# EAGLE board Qwiic_Multi_Port_Board-Panel (EAGLE 9.6.2), part 1 of 2
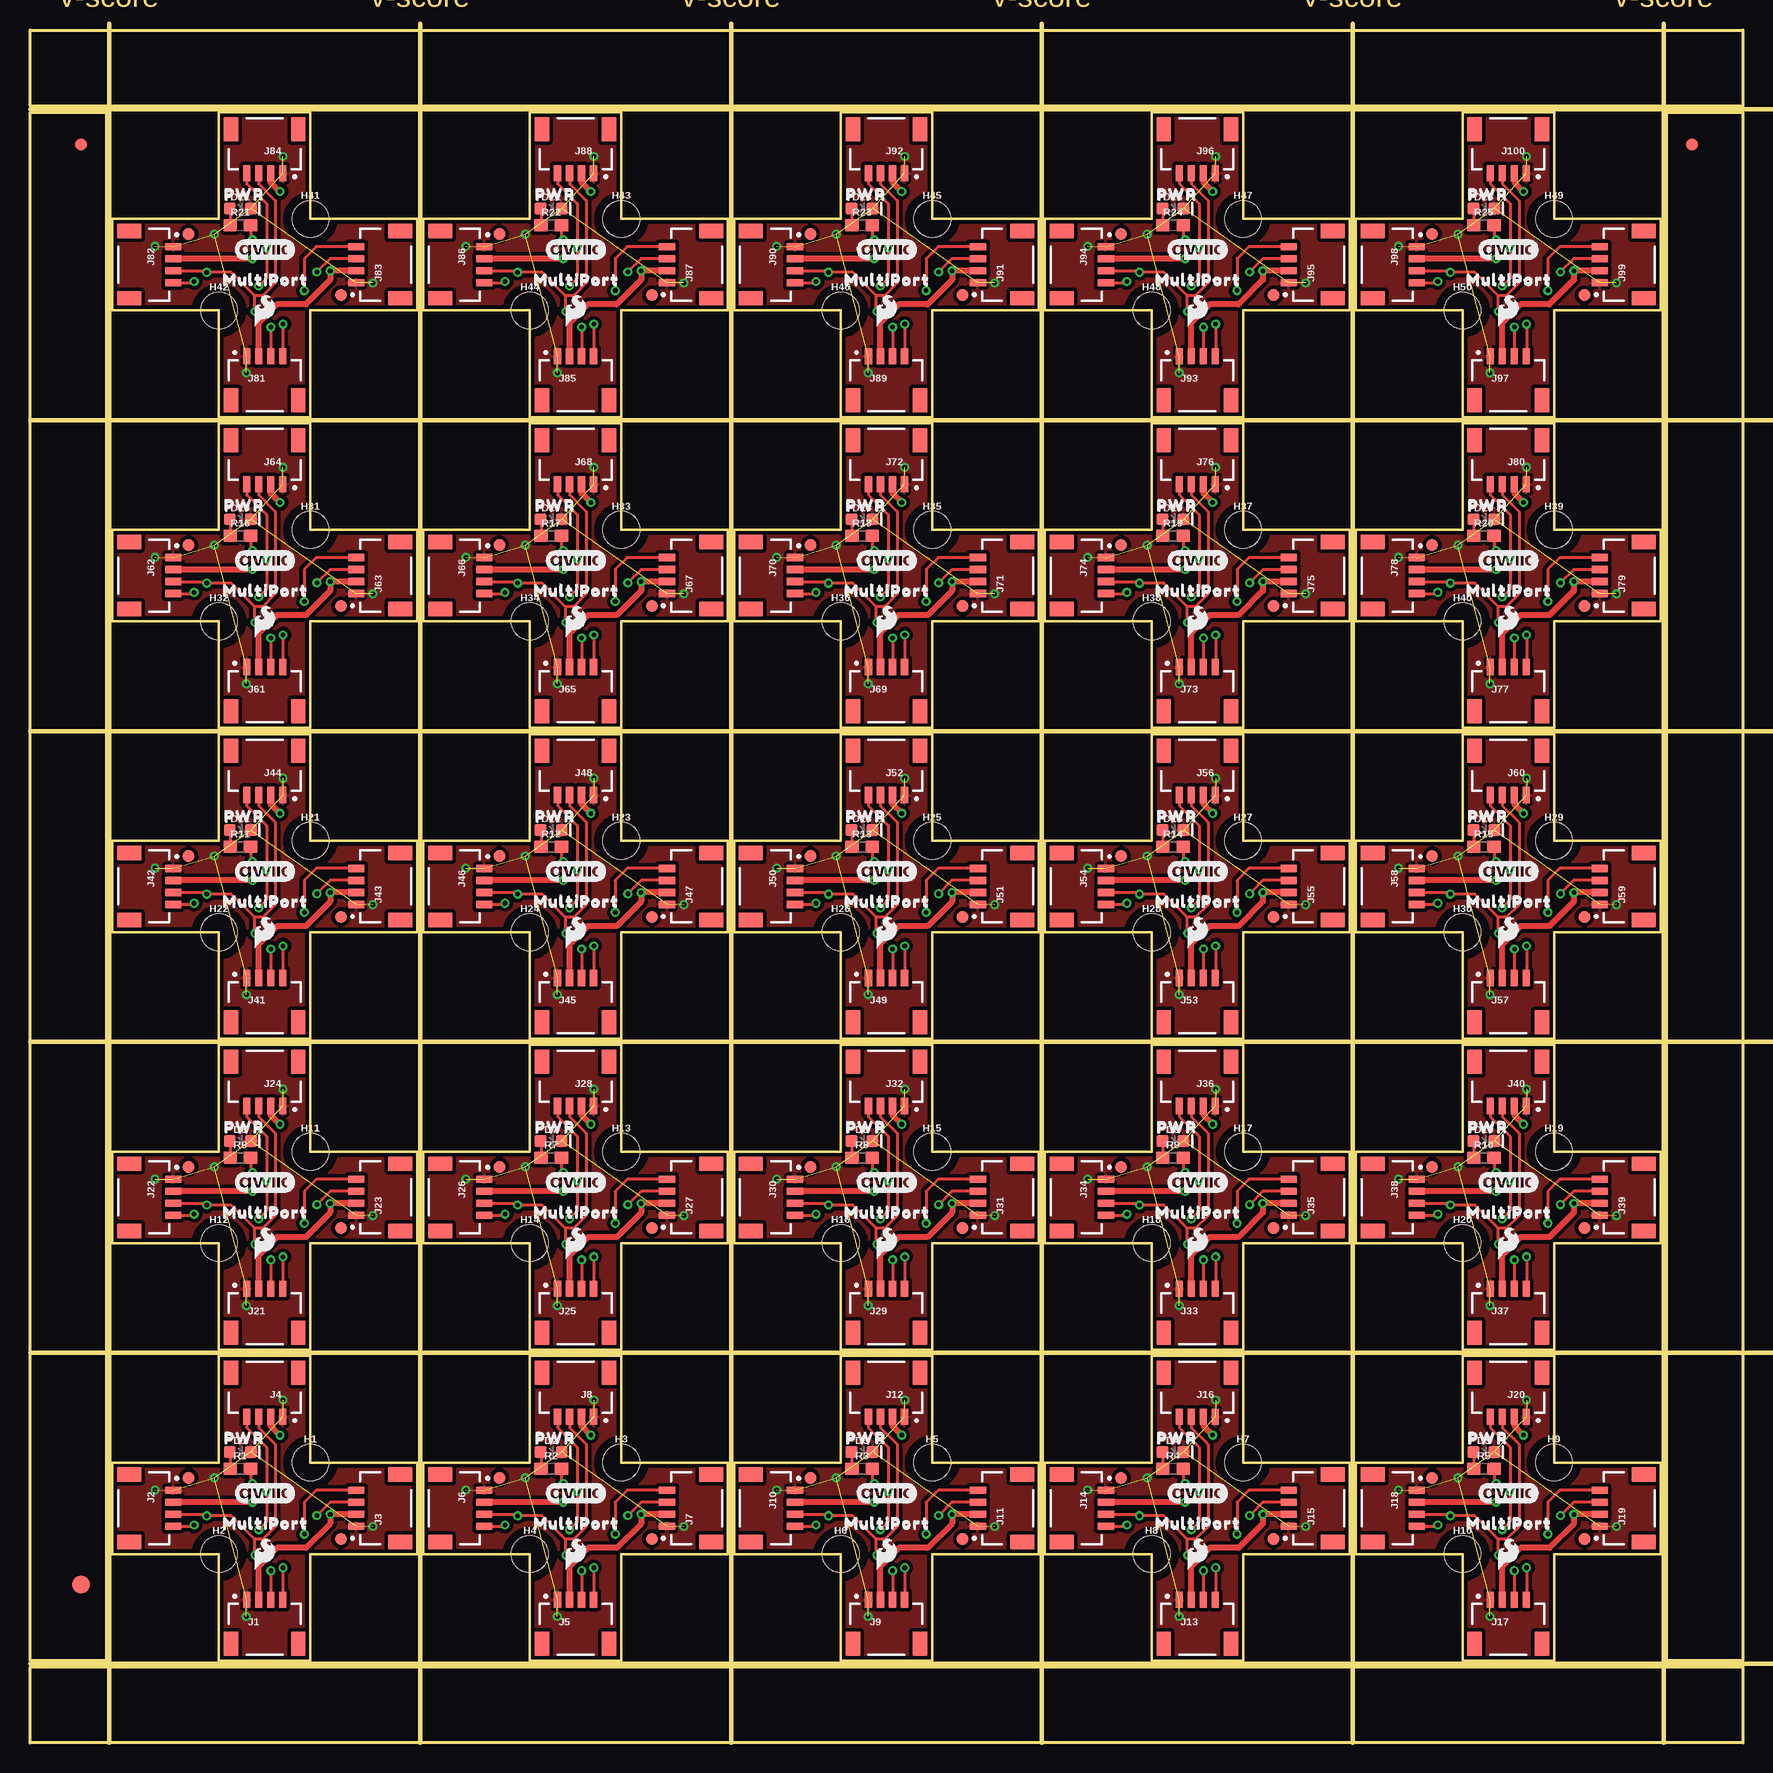
[diagram p0: board, top side]
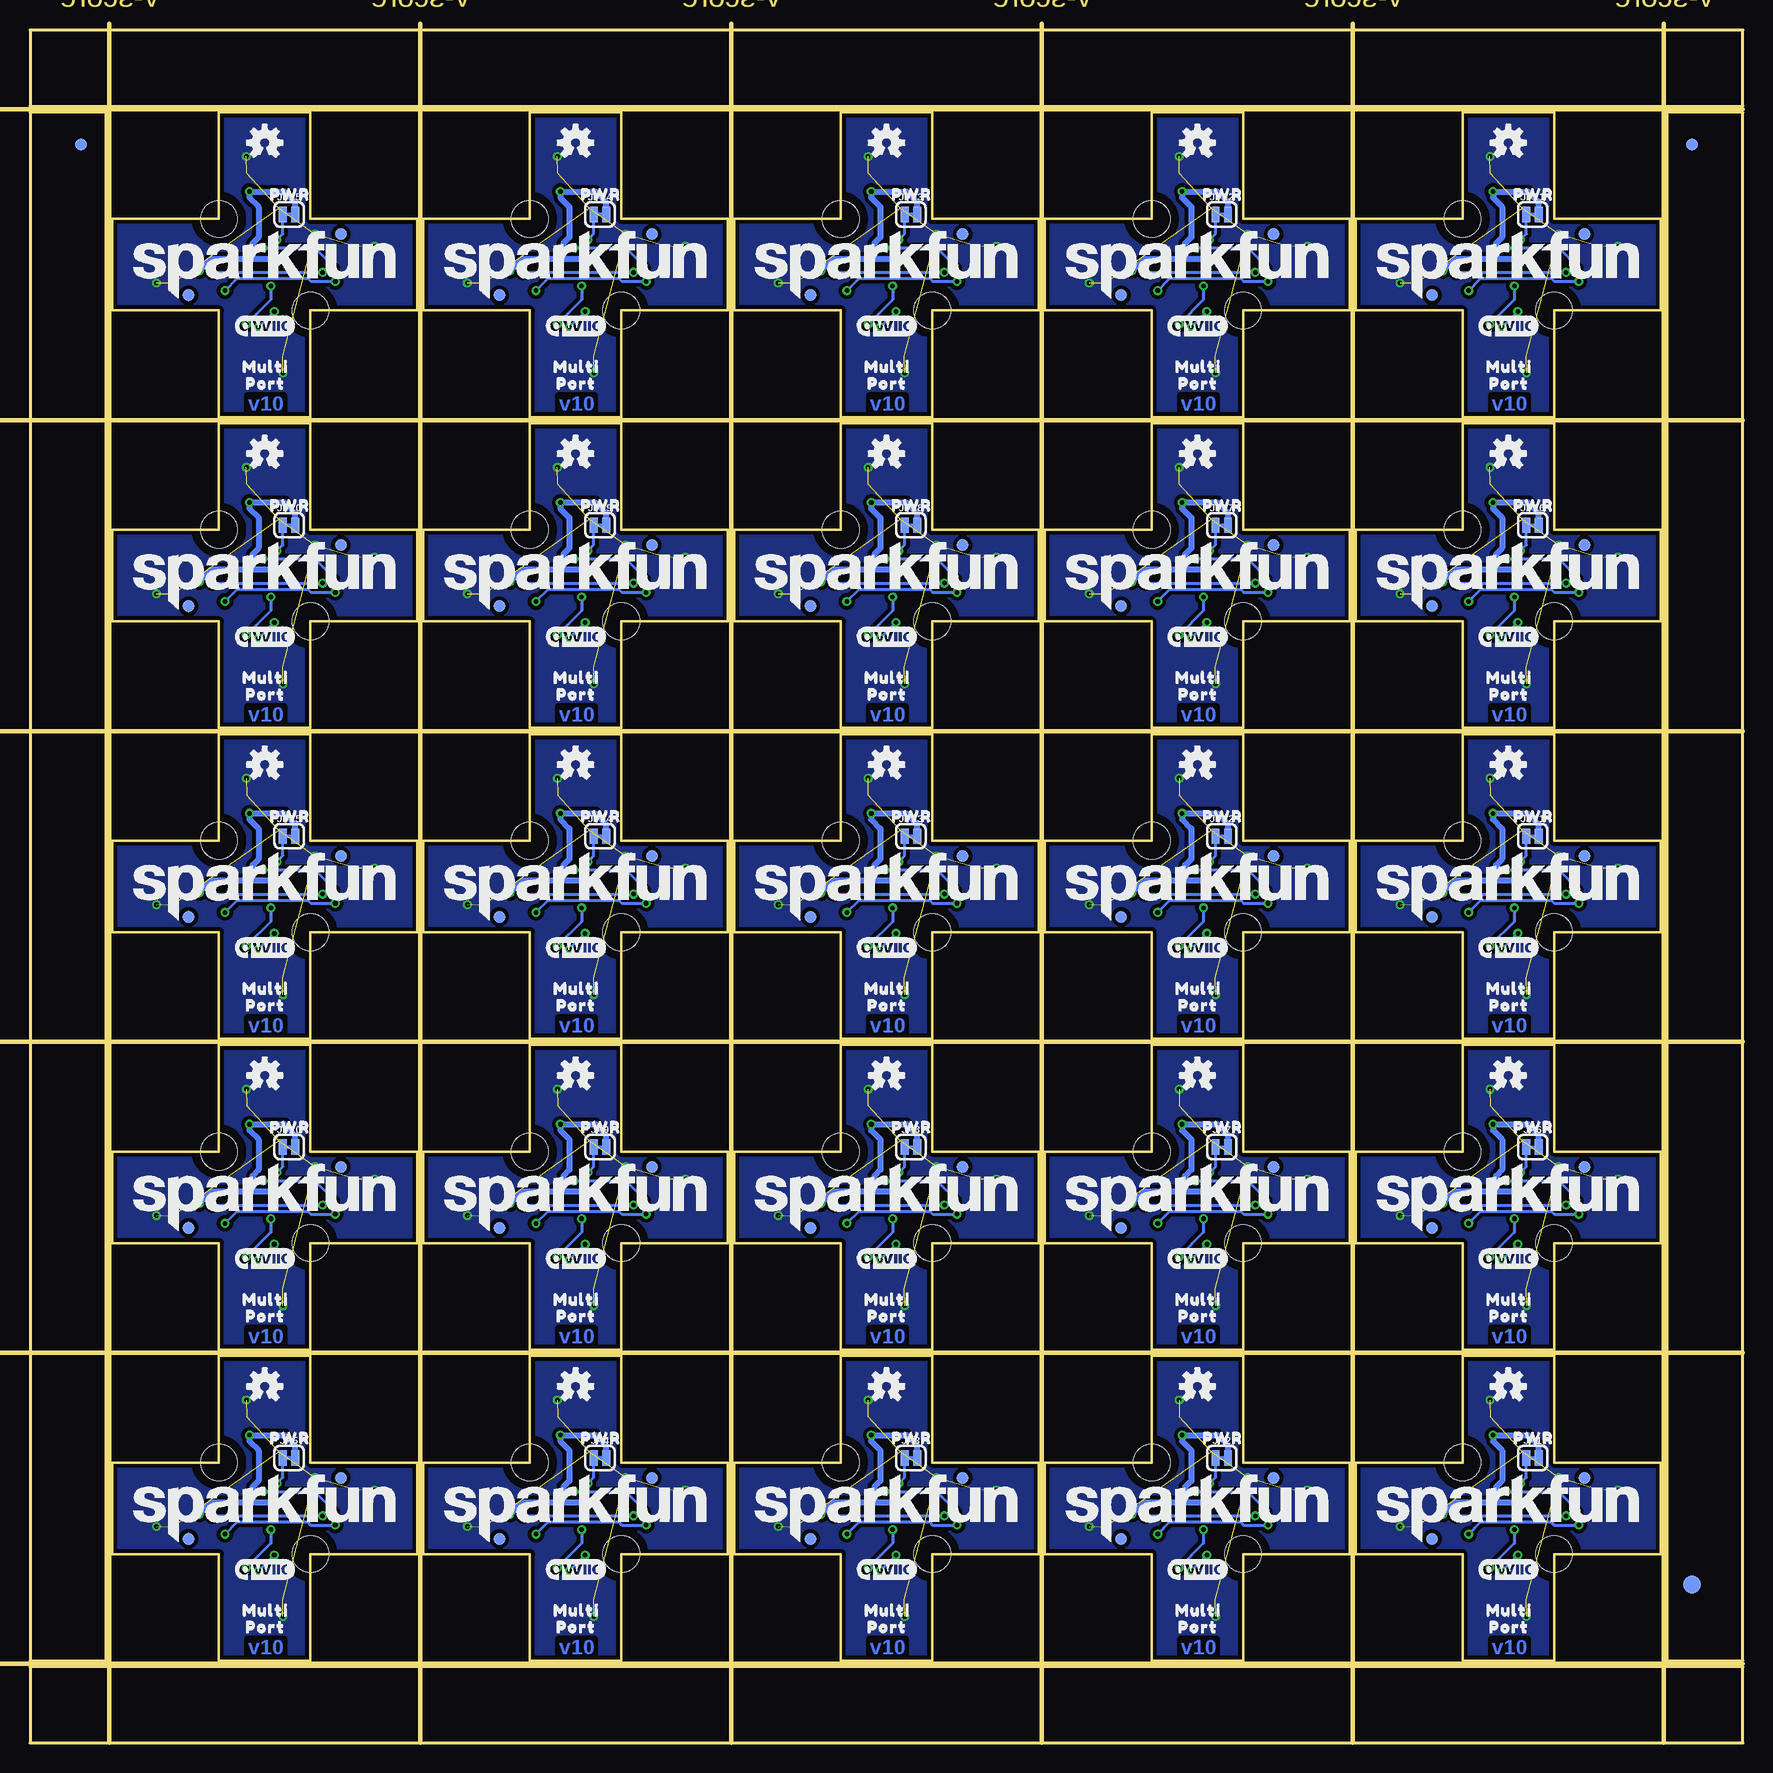
[diagram p1: board, bottom side, seen from below]

Size 142.75 x 142.75 mm. Coordinates in mm from the lower left corner, seen from the top.
Outline: 316 segments
Copper layers (1*16): Top 0.035mm / dielectric 1.5mm / Bottom 0.035mm
Design rules "Qwiic_Multi_Port_Board": minimum track width 7mil, minimum drill 0.3mm, track to track 7mil, track to pad 7mil, pad to pad 7mil, via to via 7mil, smd to smd 7mil, copper to edge 7mil, drill to drill 7mil, minimum pad ring 7mil, minimum via ring 7mil, stop-mask expansion 3mil, vias tented up to drill 25mil, thermal gap 10mil
Milling: 12 lines

## Footprints (pad centres in the part's own frame; a part is rotated, then mirrored left to right if it is on the bottom)
LED-0603 = smd 1 x 1: A -0.877,0; C 0.877,0
FIDUCIAL-1X2 = smd 1 x 1: 1 0,0
FIDUCIAL-1.5X3 = smd 1.5 x 1.5: 1 0,0
STAND-OFF-TIGHT = hole 3.048: 0,0
JST04_1MM_RA = smd 0.6 x 1.35: 1 -1.5,0; 2 -0.5,0; 3 0.5,0; 4 1.5,0 | smd 1.2 x 2: NC1 2.8,-3.675; NC2 -2.8,-3.675
SMT-JUMPER_2_NC_TRACE_SILK = smd 0.66 x 1.27: 1 -0.521,0; 2 0.521,0
0603 = smd 1.1 x 1: 1 -0.85,0; 2 0.85,0

## Placement (x,y rotation side)
D1  RED  [LED-0603]  17.53,24.26 0 top
D2  RED  [LED-0603]  43.43,24.26 0 top
D3  RED  [LED-0603]  69.34,24.26 0 top
D4  RED  [LED-0603]  95.25,24.26 0 top
D5  RED  [LED-0603]  121.16,24.26 0 top
D6  RED  [LED-0603]  17.53,50.16 0 top
D7  RED  [LED-0603]  43.43,50.16 0 top
D8  RED  [LED-0603]  69.34,50.16 0 top
D9  RED  [LED-0603]  95.25,50.16 0 top
D10  RED  [LED-0603]  121.16,50.16 0 top
D11  RED  [LED-0603]  17.53,76.07 0 top
D12  RED  [LED-0603]  43.43,76.07 0 top
D13  RED  [LED-0603]  69.34,76.07 0 top
D14  RED  [LED-0603]  95.25,76.07 0 top
D15  RED  [LED-0603]  121.16,76.07 0 top
D16  RED  [LED-0603]  17.53,101.98 0 top
D17  RED  [LED-0603]  43.43,101.98 0 top
D18  RED  [LED-0603]  69.34,101.98 0 top
D19  RED  [LED-0603]  95.25,101.98 0 top
D20  RED  [LED-0603]  121.16,101.98 0 top
D21  RED  [LED-0603]  17.53,127.89 0 top
D22  RED  [LED-0603]  43.43,127.89 0 top
D23  RED  [LED-0603]  69.34,127.89 0 top
D24  RED  [LED-0603]  95.25,127.89 0 top
D25  RED  [LED-0603]  121.16,127.89 0 top
E$1  [FIDUCIAL-1X2]  4.23,133.22 0 top
E$2  [FIDUCIAL-1X2]  4.23,133.22 0 bottom
E$3  [FIDUCIAL-1X2]  138.51,133.22 0 top
E$4  [FIDUCIAL-1X2]  138.51,133.22 0 bottom
E$5  [FIDUCIAL-1.5X3]  4.23,13.21 0 top
E$6  [FIDUCIAL-1.5X3]  4.23,13.21 0 bottom
FD1  FIDUCIAL1X2  [FIDUCIAL-1X2]  13.21,22.1 0 bottom
FD2  FIDUCIAL1X2  [FIDUCIAL-1X2]  13.21,22.1 0 top
FD3  FIDUCIAL1X2  [FIDUCIAL-1X2]  25.91,17.02 0 top
FD4  FIDUCIAL1X2  [FIDUCIAL-1X2]  25.91,17.02 0 bottom
FD5  FIDUCIAL1X2  [FIDUCIAL-1X2]  39.12,22.1 0 bottom
FD6  FIDUCIAL1X2  [FIDUCIAL-1X2]  39.12,22.1 0 top
FD7  FIDUCIAL1X2  [FIDUCIAL-1X2]  51.82,17.02 0 top
FD8  FIDUCIAL1X2  [FIDUCIAL-1X2]  51.82,17.02 0 bottom
FD9  FIDUCIAL1X2  [FIDUCIAL-1X2]  65.02,22.1 0 bottom
FD10  FIDUCIAL1X2  [FIDUCIAL-1X2]  65.02,22.1 0 top
FD11  FIDUCIAL1X2  [FIDUCIAL-1X2]  77.72,17.02 0 top
FD12  FIDUCIAL1X2  [FIDUCIAL-1X2]  77.72,17.02 0 bottom
FD13  FIDUCIAL1X2  [FIDUCIAL-1X2]  90.93,22.1 0 bottom
FD14  FIDUCIAL1X2  [FIDUCIAL-1X2]  90.93,22.1 0 top
FD15  FIDUCIAL1X2  [FIDUCIAL-1X2]  103.63,17.02 0 top
FD16  FIDUCIAL1X2  [FIDUCIAL-1X2]  103.63,17.02 0 bottom
FD17  FIDUCIAL1X2  [FIDUCIAL-1X2]  116.84,22.1 0 bottom
FD18  FIDUCIAL1X2  [FIDUCIAL-1X2]  116.84,22.1 0 top
FD19  FIDUCIAL1X2  [FIDUCIAL-1X2]  129.54,17.02 0 top
FD20  FIDUCIAL1X2  [FIDUCIAL-1X2]  129.54,17.02 0 bottom
FD21  FIDUCIAL1X2  [FIDUCIAL-1X2]  13.21,48.01 0 bottom
FD22  FIDUCIAL1X2  [FIDUCIAL-1X2]  13.21,48.01 0 top
FD23  FIDUCIAL1X2  [FIDUCIAL-1X2]  25.91,42.93 0 top
FD24  FIDUCIAL1X2  [FIDUCIAL-1X2]  25.91,42.93 0 bottom
FD25  FIDUCIAL1X2  [FIDUCIAL-1X2]  39.12,48.01 0 bottom
FD26  FIDUCIAL1X2  [FIDUCIAL-1X2]  39.12,48.01 0 top
FD27  FIDUCIAL1X2  [FIDUCIAL-1X2]  51.82,42.93 0 top
FD28  FIDUCIAL1X2  [FIDUCIAL-1X2]  51.82,42.93 0 bottom
FD29  FIDUCIAL1X2  [FIDUCIAL-1X2]  65.02,48.01 0 bottom
FD30  FIDUCIAL1X2  [FIDUCIAL-1X2]  65.02,48.01 0 top
FD31  FIDUCIAL1X2  [FIDUCIAL-1X2]  77.72,42.93 0 top
FD32  FIDUCIAL1X2  [FIDUCIAL-1X2]  77.72,42.93 0 bottom
FD33  FIDUCIAL1X2  [FIDUCIAL-1X2]  90.93,48.01 0 bottom
FD34  FIDUCIAL1X2  [FIDUCIAL-1X2]  90.93,48.01 0 top
FD35  FIDUCIAL1X2  [FIDUCIAL-1X2]  103.63,42.93 0 top
FD36  FIDUCIAL1X2  [FIDUCIAL-1X2]  103.63,42.93 0 bottom
FD37  FIDUCIAL1X2  [FIDUCIAL-1X2]  116.84,48.01 0 bottom
FD38  FIDUCIAL1X2  [FIDUCIAL-1X2]  116.84,48.01 0 top
FD39  FIDUCIAL1X2  [FIDUCIAL-1X2]  129.54,42.93 0 top
FD40  FIDUCIAL1X2  [FIDUCIAL-1X2]  129.54,42.93 0 bottom
FD41  FIDUCIAL1X2  [FIDUCIAL-1X2]  13.21,73.91 0 bottom
FD42  FIDUCIAL1X2  [FIDUCIAL-1X2]  13.21,73.91 0 top
FD43  FIDUCIAL1X2  [FIDUCIAL-1X2]  25.91,68.83 0 top
FD44  FIDUCIAL1X2  [FIDUCIAL-1X2]  25.91,68.83 0 bottom
FD45  FIDUCIAL1X2  [FIDUCIAL-1X2]  39.12,73.91 0 bottom
FD46  FIDUCIAL1X2  [FIDUCIAL-1X2]  39.12,73.91 0 top
FD47  FIDUCIAL1X2  [FIDUCIAL-1X2]  51.82,68.83 0 top
FD48  FIDUCIAL1X2  [FIDUCIAL-1X2]  51.82,68.83 0 bottom
FD49  FIDUCIAL1X2  [FIDUCIAL-1X2]  65.02,73.91 0 bottom
FD50  FIDUCIAL1X2  [FIDUCIAL-1X2]  65.02,73.91 0 top
FD51  FIDUCIAL1X2  [FIDUCIAL-1X2]  77.72,68.83 0 top
FD52  FIDUCIAL1X2  [FIDUCIAL-1X2]  77.72,68.83 0 bottom
FD53  FIDUCIAL1X2  [FIDUCIAL-1X2]  90.93,73.91 0 bottom
FD54  FIDUCIAL1X2  [FIDUCIAL-1X2]  90.93,73.91 0 top
FD55  FIDUCIAL1X2  [FIDUCIAL-1X2]  103.63,68.83 0 top
FD56  FIDUCIAL1X2  [FIDUCIAL-1X2]  103.63,68.83 0 bottom
FD57  FIDUCIAL1X2  [FIDUCIAL-1X2]  116.84,73.91 0 bottom
FD58  FIDUCIAL1X2  [FIDUCIAL-1X2]  116.84,73.91 0 top
FD59  FIDUCIAL1X2  [FIDUCIAL-1X2]  129.54,68.83 0 top
FD60  FIDUCIAL1X2  [FIDUCIAL-1X2]  129.54,68.83 0 bottom
FD61  FIDUCIAL1X2  [FIDUCIAL-1X2]  13.21,99.82 0 bottom
FD62  FIDUCIAL1X2  [FIDUCIAL-1X2]  13.21,99.82 0 top
FD63  FIDUCIAL1X2  [FIDUCIAL-1X2]  25.91,94.74 0 top
FD64  FIDUCIAL1X2  [FIDUCIAL-1X2]  25.91,94.74 0 bottom
FD65  FIDUCIAL1X2  [FIDUCIAL-1X2]  39.12,99.82 0 bottom
FD66  FIDUCIAL1X2  [FIDUCIAL-1X2]  39.12,99.82 0 top
FD67  FIDUCIAL1X2  [FIDUCIAL-1X2]  51.82,94.74 0 top
FD68  FIDUCIAL1X2  [FIDUCIAL-1X2]  51.82,94.74 0 bottom
FD69  FIDUCIAL1X2  [FIDUCIAL-1X2]  65.02,99.82 0 bottom
FD70  FIDUCIAL1X2  [FIDUCIAL-1X2]  65.02,99.82 0 top
FD71  FIDUCIAL1X2  [FIDUCIAL-1X2]  77.72,94.74 0 top
FD72  FIDUCIAL1X2  [FIDUCIAL-1X2]  77.72,94.74 0 bottom
FD73  FIDUCIAL1X2  [FIDUCIAL-1X2]  90.93,99.82 0 bottom
FD74  FIDUCIAL1X2  [FIDUCIAL-1X2]  90.93,99.82 0 top
FD75  FIDUCIAL1X2  [FIDUCIAL-1X2]  103.63,94.74 0 top
FD76  FIDUCIAL1X2  [FIDUCIAL-1X2]  103.63,94.74 0 bottom
FD77  FIDUCIAL1X2  [FIDUCIAL-1X2]  116.84,99.82 0 bottom
FD78  FIDUCIAL1X2  [FIDUCIAL-1X2]  116.84,99.82 0 top
FD79  FIDUCIAL1X2  [FIDUCIAL-1X2]  129.54,94.74 0 top
FD80  FIDUCIAL1X2  [FIDUCIAL-1X2]  129.54,94.74 0 bottom
FD81  FIDUCIAL1X2  [FIDUCIAL-1X2]  13.21,125.73 0 bottom
FD82  FIDUCIAL1X2  [FIDUCIAL-1X2]  13.21,125.73 0 top
FD83  FIDUCIAL1X2  [FIDUCIAL-1X2]  25.91,120.65 0 top
FD84  FIDUCIAL1X2  [FIDUCIAL-1X2]  25.91,120.65 0 bottom
FD85  FIDUCIAL1X2  [FIDUCIAL-1X2]  39.12,125.73 0 bottom
FD86  FIDUCIAL1X2  [FIDUCIAL-1X2]  39.12,125.73 0 top
FD87  FIDUCIAL1X2  [FIDUCIAL-1X2]  51.82,120.65 0 top
FD88  FIDUCIAL1X2  [FIDUCIAL-1X2]  51.82,120.65 0 bottom
FD89  FIDUCIAL1X2  [FIDUCIAL-1X2]  65.02,125.73 0 bottom
FD90  FIDUCIAL1X2  [FIDUCIAL-1X2]  65.02,125.73 0 top
FD91  FIDUCIAL1X2  [FIDUCIAL-1X2]  77.72,120.65 0 top
FD92  FIDUCIAL1X2  [FIDUCIAL-1X2]  77.72,120.65 0 bottom
FD93  FIDUCIAL1X2  [FIDUCIAL-1X2]  90.93,125.73 0 bottom
FD94  FIDUCIAL1X2  [FIDUCIAL-1X2]  90.93,125.73 0 top
FD95  FIDUCIAL1X2  [FIDUCIAL-1X2]  103.63,120.65 0 top
FD96  FIDUCIAL1X2  [FIDUCIAL-1X2]  103.63,120.65 0 bottom
FD97  FIDUCIAL1X2  [FIDUCIAL-1X2]  116.84,125.73 0 bottom
FD98  FIDUCIAL1X2  [FIDUCIAL-1X2]  116.84,125.73 0 top
FD99  FIDUCIAL1X2  [FIDUCIAL-1X2]  129.54,120.65 0 top
FD100  FIDUCIAL1X2  [FIDUCIAL-1X2]  129.54,120.65 0 bottom
H1  STAND-OFFTIGHT  [STAND-OFF-TIGHT]  23.37,23.37 0 top
H2  STAND-OFFTIGHT  [STAND-OFF-TIGHT]  15.75,15.75 0 top
H3  STAND-OFFTIGHT  [STAND-OFF-TIGHT]  49.28,23.37 0 top
H4  STAND-OFFTIGHT  [STAND-OFF-TIGHT]  41.66,15.75 0 top
H5  STAND-OFFTIGHT  [STAND-OFF-TIGHT]  75.18,23.37 0 top
H6  STAND-OFFTIGHT  [STAND-OFF-TIGHT]  67.56,15.75 0 top
H7  STAND-OFFTIGHT  [STAND-OFF-TIGHT]  101.09,23.37 0 top
H8  STAND-OFFTIGHT  [STAND-OFF-TIGHT]  93.47,15.75 0 top
H9  STAND-OFFTIGHT  [STAND-OFF-TIGHT]  127,23.37 0 top
H10  STAND-OFFTIGHT  [STAND-OFF-TIGHT]  119.38,15.75 0 top
H11  STAND-OFFTIGHT  [STAND-OFF-TIGHT]  23.37,49.28 0 top
H12  STAND-OFFTIGHT  [STAND-OFF-TIGHT]  15.75,41.66 0 top
H13  STAND-OFFTIGHT  [STAND-OFF-TIGHT]  49.28,49.28 0 top
H14  STAND-OFFTIGHT  [STAND-OFF-TIGHT]  41.66,41.66 0 top
H15  STAND-OFFTIGHT  [STAND-OFF-TIGHT]  75.18,49.28 0 top
H16  STAND-OFFTIGHT  [STAND-OFF-TIGHT]  67.56,41.66 0 top
H17  STAND-OFFTIGHT  [STAND-OFF-TIGHT]  101.09,49.28 0 top
H18  STAND-OFFTIGHT  [STAND-OFF-TIGHT]  93.47,41.66 0 top
H19  STAND-OFFTIGHT  [STAND-OFF-TIGHT]  127,49.28 0 top
H20  STAND-OFFTIGHT  [STAND-OFF-TIGHT]  119.38,41.66 0 top
H21  STAND-OFFTIGHT  [STAND-OFF-TIGHT]  23.37,75.18 0 top
H22  STAND-OFFTIGHT  [STAND-OFF-TIGHT]  15.75,67.56 0 top
H23  STAND-OFFTIGHT  [STAND-OFF-TIGHT]  49.28,75.18 0 top
H24  STAND-OFFTIGHT  [STAND-OFF-TIGHT]  41.66,67.56 0 top
H25  STAND-OFFTIGHT  [STAND-OFF-TIGHT]  75.18,75.18 0 top
H26  STAND-OFFTIGHT  [STAND-OFF-TIGHT]  67.56,67.56 0 top
H27  STAND-OFFTIGHT  [STAND-OFF-TIGHT]  101.09,75.18 0 top
H28  STAND-OFFTIGHT  [STAND-OFF-TIGHT]  93.47,67.56 0 top
H29  STAND-OFFTIGHT  [STAND-OFF-TIGHT]  127,75.18 0 top
H30  STAND-OFFTIGHT  [STAND-OFF-TIGHT]  119.38,67.56 0 top
H31  STAND-OFFTIGHT  [STAND-OFF-TIGHT]  23.37,101.09 0 top
H32  STAND-OFFTIGHT  [STAND-OFF-TIGHT]  15.75,93.47 0 top
H33  STAND-OFFTIGHT  [STAND-OFF-TIGHT]  49.28,101.09 0 top
H34  STAND-OFFTIGHT  [STAND-OFF-TIGHT]  41.66,93.47 0 top
H35  STAND-OFFTIGHT  [STAND-OFF-TIGHT]  75.18,101.09 0 top
H36  STAND-OFFTIGHT  [STAND-OFF-TIGHT]  67.56,93.47 0 top
H37  STAND-OFFTIGHT  [STAND-OFF-TIGHT]  101.09,101.09 0 top
H38  STAND-OFFTIGHT  [STAND-OFF-TIGHT]  93.47,93.47 0 top
H39  STAND-OFFTIGHT  [STAND-OFF-TIGHT]  127,101.09 0 top
H40  STAND-OFFTIGHT  [STAND-OFF-TIGHT]  119.38,93.47 0 top
H41  STAND-OFFTIGHT  [STAND-OFF-TIGHT]  23.37,127 0 top
H42  STAND-OFFTIGHT  [STAND-OFF-TIGHT]  15.75,119.38 0 top
H43  STAND-OFFTIGHT  [STAND-OFF-TIGHT]  49.28,127 0 top
H44  STAND-OFFTIGHT  [STAND-OFF-TIGHT]  41.66,119.38 0 top
H45  STAND-OFFTIGHT  [STAND-OFF-TIGHT]  75.18,127 0 top
H46  STAND-OFFTIGHT  [STAND-OFF-TIGHT]  67.56,119.38 0 top
H47  STAND-OFFTIGHT  [STAND-OFF-TIGHT]  101.09,127 0 top
H48  STAND-OFFTIGHT  [STAND-OFF-TIGHT]  93.47,119.38 0 top
H49  STAND-OFFTIGHT  [STAND-OFF-TIGHT]  127,127 0 top
H50  STAND-OFFTIGHT  [STAND-OFF-TIGHT]  119.38,119.38 0 top
J1  QWIIC_RIGHT_ANGLE  [JST04_1MM_RA]  19.56,11.94 0 top
J2  QWIIC_RIGHT_ANGLE  [JST04_1MM_RA]  11.94,19.56 270 top
J3  QWIIC_RIGHT_ANGLE  [JST04_1MM_RA]  27.18,19.56 90 top
J4  QWIIC_RIGHT_ANGLE  [JST04_1MM_RA]  19.56,27.18 180 top
J5  QWIIC_RIGHT_ANGLE  [JST04_1MM_RA]  45.47,11.94 0 top
J6  QWIIC_RIGHT_ANGLE  [JST04_1MM_RA]  37.85,19.56 270 top
J7  QWIIC_RIGHT_ANGLE  [JST04_1MM_RA]  53.09,19.56 90 top
J8  QWIIC_RIGHT_ANGLE  [JST04_1MM_RA]  45.47,27.18 180 top
J9  QWIIC_RIGHT_ANGLE  [JST04_1MM_RA]  71.37,11.94 0 top
J10  QWIIC_RIGHT_ANGLE  [JST04_1MM_RA]  63.75,19.56 270 top
J11  QWIIC_RIGHT_ANGLE  [JST04_1MM_RA]  78.99,19.56 90 top
J12  QWIIC_RIGHT_ANGLE  [JST04_1MM_RA]  71.37,27.18 180 top
J13  QWIIC_RIGHT_ANGLE  [JST04_1MM_RA]  97.28,11.94 0 top
J14  QWIIC_RIGHT_ANGLE  [JST04_1MM_RA]  89.66,19.56 270 top
J15  QWIIC_RIGHT_ANGLE  [JST04_1MM_RA]  104.9,19.56 90 top
J16  QWIIC_RIGHT_ANGLE  [JST04_1MM_RA]  97.28,27.18 180 top
J17  QWIIC_RIGHT_ANGLE  [JST04_1MM_RA]  123.19,11.94 0 top
J18  QWIIC_RIGHT_ANGLE  [JST04_1MM_RA]  115.57,19.56 270 top
J19  QWIIC_RIGHT_ANGLE  [JST04_1MM_RA]  130.81,19.56 90 top
J20  QWIIC_RIGHT_ANGLE  [JST04_1MM_RA]  123.19,27.18 180 top
J21  QWIIC_RIGHT_ANGLE  [JST04_1MM_RA]  19.56,37.85 0 top
J22  QWIIC_RIGHT_ANGLE  [JST04_1MM_RA]  11.94,45.47 270 top
J23  QWIIC_RIGHT_ANGLE  [JST04_1MM_RA]  27.18,45.47 90 top
J24  QWIIC_RIGHT_ANGLE  [JST04_1MM_RA]  19.56,53.09 180 top
J25  QWIIC_RIGHT_ANGLE  [JST04_1MM_RA]  45.47,37.85 0 top
J26  QWIIC_RIGHT_ANGLE  [JST04_1MM_RA]  37.85,45.47 270 top
J27  QWIIC_RIGHT_ANGLE  [JST04_1MM_RA]  53.09,45.47 90 top
J28  QWIIC_RIGHT_ANGLE  [JST04_1MM_RA]  45.47,53.09 180 top
J29  QWIIC_RIGHT_ANGLE  [JST04_1MM_RA]  71.37,37.85 0 top
J30  QWIIC_RIGHT_ANGLE  [JST04_1MM_RA]  63.75,45.47 270 top
J31  QWIIC_RIGHT_ANGLE  [JST04_1MM_RA]  78.99,45.47 90 top
J32  QWIIC_RIGHT_ANGLE  [JST04_1MM_RA]  71.37,53.09 180 top
J33  QWIIC_RIGHT_ANGLE  [JST04_1MM_RA]  97.28,37.85 0 top
J34  QWIIC_RIGHT_ANGLE  [JST04_1MM_RA]  89.66,45.47 270 top
J35  QWIIC_RIGHT_ANGLE  [JST04_1MM_RA]  104.9,45.47 90 top
J36  QWIIC_RIGHT_ANGLE  [JST04_1MM_RA]  97.28,53.09 180 top
J37  QWIIC_RIGHT_ANGLE  [JST04_1MM_RA]  123.19,37.85 0 top
J38  QWIIC_RIGHT_ANGLE  [JST04_1MM_RA]  115.57,45.47 270 top
J39  QWIIC_RIGHT_ANGLE  [JST04_1MM_RA]  130.81,45.47 90 top
J40  QWIIC_RIGHT_ANGLE  [JST04_1MM_RA]  123.19,53.09 180 top
J41  QWIIC_RIGHT_ANGLE  [JST04_1MM_RA]  19.56,63.75 0 top
J42  QWIIC_RIGHT_ANGLE  [JST04_1MM_RA]  11.94,71.37 270 top
J43  QWIIC_RIGHT_ANGLE  [JST04_1MM_RA]  27.18,71.37 90 top
J44  QWIIC_RIGHT_ANGLE  [JST04_1MM_RA]  19.56,78.99 180 top
J45  QWIIC_RIGHT_ANGLE  [JST04_1MM_RA]  45.47,63.75 0 top
J46  QWIIC_RIGHT_ANGLE  [JST04_1MM_RA]  37.85,71.37 270 top
J47  QWIIC_RIGHT_ANGLE  [JST04_1MM_RA]  53.09,71.37 90 top
J48  QWIIC_RIGHT_ANGLE  [JST04_1MM_RA]  45.47,78.99 180 top
J49  QWIIC_RIGHT_ANGLE  [JST04_1MM_RA]  71.37,63.75 0 top
J50  QWIIC_RIGHT_ANGLE  [JST04_1MM_RA]  63.75,71.37 270 top
J51  QWIIC_RIGHT_ANGLE  [JST04_1MM_RA]  78.99,71.37 90 top
J52  QWIIC_RIGHT_ANGLE  [JST04_1MM_RA]  71.37,78.99 180 top
J53  QWIIC_RIGHT_ANGLE  [JST04_1MM_RA]  97.28,63.75 0 top
J54  QWIIC_RIGHT_ANGLE  [JST04_1MM_RA]  89.66,71.37 270 top
J55  QWIIC_RIGHT_ANGLE  [JST04_1MM_RA]  104.9,71.37 90 top
J56  QWIIC_RIGHT_ANGLE  [JST04_1MM_RA]  97.28,78.99 180 top
J57  QWIIC_RIGHT_ANGLE  [JST04_1MM_RA]  123.19,63.75 0 top
J58  QWIIC_RIGHT_ANGLE  [JST04_1MM_RA]  115.57,71.37 270 top
J59  QWIIC_RIGHT_ANGLE  [JST04_1MM_RA]  130.81,71.37 90 top
J60  QWIIC_RIGHT_ANGLE  [JST04_1MM_RA]  123.19,78.99 180 top
J61  QWIIC_RIGHT_ANGLE  [JST04_1MM_RA]  19.56,89.66 0 top
J62  QWIIC_RIGHT_ANGLE  [JST04_1MM_RA]  11.94,97.28 270 top
J63  QWIIC_RIGHT_ANGLE  [JST04_1MM_RA]  27.18,97.28 90 top
J64  QWIIC_RIGHT_ANGLE  [JST04_1MM_RA]  19.56,104.9 180 top
J65  QWIIC_RIGHT_ANGLE  [JST04_1MM_RA]  45.47,89.66 0 top
J66  QWIIC_RIGHT_ANGLE  [JST04_1MM_RA]  37.85,97.28 270 top
J67  QWIIC_RIGHT_ANGLE  [JST04_1MM_RA]  53.09,97.28 90 top
J68  QWIIC_RIGHT_ANGLE  [JST04_1MM_RA]  45.47,104.9 180 top
J69  QWIIC_RIGHT_ANGLE  [JST04_1MM_RA]  71.37,89.66 0 top
J70  QWIIC_RIGHT_ANGLE  [JST04_1MM_RA]  63.75,97.28 270 top
J71  QWIIC_RIGHT_ANGLE  [JST04_1MM_RA]  78.99,97.28 90 top
J72  QWIIC_RIGHT_ANGLE  [JST04_1MM_RA]  71.37,104.9 180 top
J73  QWIIC_RIGHT_ANGLE  [JST04_1MM_RA]  97.28,89.66 0 top
J74  QWIIC_RIGHT_ANGLE  [JST04_1MM_RA]  89.66,97.28 270 top
J75  QWIIC_RIGHT_ANGLE  [JST04_1MM_RA]  104.9,97.28 90 top
J76  QWIIC_RIGHT_ANGLE  [JST04_1MM_RA]  97.28,104.9 180 top
J77  QWIIC_RIGHT_ANGLE  [JST04_1MM_RA]  123.19,89.66 0 top
J78  QWIIC_RIGHT_ANGLE  [JST04_1MM_RA]  115.57,97.28 270 top
J79  QWIIC_RIGHT_ANGLE  [JST04_1MM_RA]  130.81,97.28 90 top
J80  QWIIC_RIGHT_ANGLE  [JST04_1MM_RA]  123.19,104.9 180 top
J81  QWIIC_RIGHT_ANGLE  [JST04_1MM_RA]  19.56,115.57 0 top
J82  QWIIC_RIGHT_ANGLE  [JST04_1MM_RA]  11.94,123.19 270 top
J83  QWIIC_RIGHT_ANGLE  [JST04_1MM_RA]  27.18,123.19 90 top
J84  QWIIC_RIGHT_ANGLE  [JST04_1MM_RA]  19.56,130.81 180 top
J85  QWIIC_RIGHT_ANGLE  [JST04_1MM_RA]  45.47,115.57 0 top
J86  QWIIC_RIGHT_ANGLE  [JST04_1MM_RA]  37.85,123.19 270 top
J87  QWIIC_RIGHT_ANGLE  [JST04_1MM_RA]  53.09,123.19 90 top
J88  QWIIC_RIGHT_ANGLE  [JST04_1MM_RA]  45.47,130.81 180 top
J89  QWIIC_RIGHT_ANGLE  [JST04_1MM_RA]  71.37,115.57 0 top
J90  QWIIC_RIGHT_ANGLE  [JST04_1MM_RA]  63.75,123.19 270 top
J91  QWIIC_RIGHT_ANGLE  [JST04_1MM_RA]  78.99,123.19 90 top
J92  QWIIC_RIGHT_ANGLE  [JST04_1MM_RA]  71.37,130.81 180 top
J93  QWIIC_RIGHT_ANGLE  [JST04_1MM_RA]  97.28,115.57 0 top
J94  QWIIC_RIGHT_ANGLE  [JST04_1MM_RA]  89.66,123.19 270 top
J95  QWIIC_RIGHT_ANGLE  [JST04_1MM_RA]  104.9,123.19 90 top
J96  QWIIC_RIGHT_ANGLE  [JST04_1MM_RA]  97.28,130.81 180 top
J97  QWIIC_RIGHT_ANGLE  [JST04_1MM_RA]  123.19,115.57 0 top
J98  QWIIC_RIGHT_ANGLE  [JST04_1MM_RA]  115.57,123.19 270 top
J99  QWIIC_RIGHT_ANGLE  [JST04_1MM_RA]  130.81,123.19 90 top
J100  QWIIC_RIGHT_ANGLE  [JST04_1MM_RA]  123.19,130.81 180 top
JP1  PWR_LED  [SMT-JUMPER_2_NC_TRACE_SILK]  17.53,23.75 0 bottom
JP2  PWR_LED  [SMT-JUMPER_2_NC_TRACE_SILK]  43.43,23.75 0 bottom
JP3  PWR_LED  [SMT-JUMPER_2_NC_TRACE_SILK]  69.34,23.75 0 bottom
JP4  PWR_LED  [SMT-JUMPER_2_NC_TRACE_SILK]  95.25,23.75 0 bottom
JP5  PWR_LED  [SMT-JUMPER_2_NC_TRACE_SILK]  121.16,23.75 0 bottom
JP6  PWR_LED  [SMT-JUMPER_2_NC_TRACE_SILK]  17.53,49.66 0 bottom
JP7  PWR_LED  [SMT-JUMPER_2_NC_TRACE_SILK]  43.43,49.66 0 bottom
JP8  PWR_LED  [SMT-JUMPER_2_NC_TRACE_SILK]  69.34,49.66 0 bottom
JP9  PWR_LED  [SMT-JUMPER_2_NC_TRACE_SILK]  95.25,49.66 0 bottom
JP10  PWR_LED  [SMT-JUMPER_2_NC_TRACE_SILK]  121.16,49.66 0 bottom
JP11  PWR_LED  [SMT-JUMPER_2_NC_TRACE_SILK]  17.53,75.56 0 bottom
JP12  PWR_LED  [SMT-JUMPER_2_NC_TRACE_SILK]  43.43,75.56 0 bottom
JP13  PWR_LED  [SMT-JUMPER_2_NC_TRACE_SILK]  69.34,75.56 0 bottom
JP14  PWR_LED  [SMT-JUMPER_2_NC_TRACE_SILK]  95.25,75.56 0 bottom
JP15  PWR_LED  [SMT-JUMPER_2_NC_TRACE_SILK]  121.16,75.56 0 bottom
JP16  PWR_LED  [SMT-JUMPER_2_NC_TRACE_SILK]  17.53,101.47 0 bottom
JP17  PWR_LED  [SMT-JUMPER_2_NC_TRACE_SILK]  43.43,101.47 0 bottom
JP18  PWR_LED  [SMT-JUMPER_2_NC_TRACE_SILK]  69.34,101.47 0 bottom
JP19  PWR_LED  [SMT-JUMPER_2_NC_TRACE_SILK]  95.25,101.47 0 bottom
JP20  PWR_LED  [SMT-JUMPER_2_NC_TRACE_SILK]  121.16,101.47 0 bottom
JP21  PWR_LED  [SMT-JUMPER_2_NC_TRACE_SILK]  17.53,127.38 0 bottom
JP22  PWR_LED  [SMT-JUMPER_2_NC_TRACE_SILK]  43.43,127.38 0 bottom
JP23  PWR_LED  [SMT-JUMPER_2_NC_TRACE_SILK]  69.34,127.38 0 bottom
JP24  PWR_LED  [SMT-JUMPER_2_NC_TRACE_SILK]  95.25,127.38 0 bottom
JP25  PWR_LED  [SMT-JUMPER_2_NC_TRACE_SILK]  121.16,127.38 0 bottom
LOGO1  QWIIC_LOGO_5MM  [QWIIC_5MM]  19.56,20.83 0 top
LOGO2  QWIIC_LOGO_5MM  [QWIIC_5MM]  19.56,14.48 0 bottom
LOGO3  OSHW-LOGOS  [OSHW-LOGO-S]  19.56,29.72 0 bottom
LOGO4  SFE_LOGO_NAME.2_INCH  [SFE_LOGO_NAME_.2]  19.56,19.56 0 bottom
LOGO5  QWIIC_LOGO_5MM  [QWIIC_5MM]  45.47,20.83 0 top
LOGO6  QWIIC_LOGO_5MM  [QWIIC_5MM]  45.47,14.48 0 bottom
LOGO7  OSHW-LOGOS  [OSHW-LOGO-S]  45.47,29.72 0 bottom
LOGO8  SFE_LOGO_NAME.2_INCH  [SFE_LOGO_NAME_.2]  45.47,19.56 0 bottom
LOGO9  QWIIC_LOGO_5MM  [QWIIC_5MM]  71.37,20.83 0 top
LOGO10  QWIIC_LOGO_5MM  [QWIIC_5MM]  71.37,14.48 0 bottom
LOGO11  OSHW-LOGOS  [OSHW-LOGO-S]  71.37,29.72 0 bottom
LOGO12  SFE_LOGO_NAME.2_INCH  [SFE_LOGO_NAME_.2]  71.37,19.56 0 bottom
LOGO13  QWIIC_LOGO_5MM  [QWIIC_5MM]  97.28,20.83 0 top
LOGO14  QWIIC_LOGO_5MM  [QWIIC_5MM]  97.28,14.48 0 bottom
LOGO15  OSHW-LOGOS  [OSHW-LOGO-S]  97.28,29.72 0 bottom
LOGO16  SFE_LOGO_NAME.2_INCH  [SFE_LOGO_NAME_.2]  97.28,19.56 0 bottom
LOGO17  QWIIC_LOGO_5MM  [QWIIC_5MM]  123.19,20.83 0 top
LOGO18  QWIIC_LOGO_5MM  [QWIIC_5MM]  123.19,14.48 0 bottom
LOGO19  OSHW-LOGOS  [OSHW-LOGO-S]  123.19,29.72 0 bottom
LOGO20  SFE_LOGO_NAME.2_INCH  [SFE_LOGO_NAME_.2]  123.19,19.56 0 bottom
LOGO21  QWIIC_LOGO_5MM  [QWIIC_5MM]  19.56,46.74 0 top
LOGO22  QWIIC_LOGO_5MM  [QWIIC_5MM]  19.56,40.39 0 bottom
LOGO23  OSHW-LOGOS  [OSHW-LOGO-S]  19.56,55.63 0 bottom
LOGO24  SFE_LOGO_NAME.2_INCH  [SFE_LOGO_NAME_.2]  19.56,45.47 0 bottom
LOGO25  QWIIC_LOGO_5MM  [QWIIC_5MM]  45.47,46.74 0 top
LOGO26  QWIIC_LOGO_5MM  [QWIIC_5MM]  45.47,40.39 0 bottom
LOGO27  OSHW-LOGOS  [OSHW-LOGO-S]  45.47,55.63 0 bottom
LOGO28  SFE_LOGO_NAME.2_INCH  [SFE_LOGO_NAME_.2]  45.47,45.47 0 bottom
LOGO29  QWIIC_LOGO_5MM  [QWIIC_5MM]  71.37,46.74 0 top
LOGO30  QWIIC_LOGO_5MM  [QWIIC_5MM]  71.37,40.39 0 bottom
LOGO31  OSHW-LOGOS  [OSHW-LOGO-S]  71.37,55.63 0 bottom
LOGO32  SFE_LOGO_NAME.2_INCH  [SFE_LOGO_NAME_.2]  71.37,45.47 0 bottom
LOGO33  QWIIC_LOGO_5MM  [QWIIC_5MM]  97.28,46.74 0 top
LOGO34  QWIIC_LOGO_5MM  [QWIIC_5MM]  97.28,40.39 0 bottom
LOGO35  OSHW-LOGOS  [OSHW-LOGO-S]  97.28,55.63 0 bottom
LOGO36  SFE_LOGO_NAME.2_INCH  [SFE_LOGO_NAME_.2]  97.28,45.47 0 bottom
LOGO37  QWIIC_LOGO_5MM  [QWIIC_5MM]  123.19,46.74 0 top
LOGO38  QWIIC_LOGO_5MM  [QWIIC_5MM]  123.19,40.39 0 bottom
LOGO39  OSHW-LOGOS  [OSHW-LOGO-S]  123.19,55.63 0 bottom
LOGO40  SFE_LOGO_NAME.2_INCH  [SFE_LOGO_NAME_.2]  123.19,45.47 0 bottom
LOGO41  QWIIC_LOGO_5MM  [QWIIC_5MM]  19.56,72.64 0 top
LOGO42  QWIIC_LOGO_5MM  [QWIIC_5MM]  19.56,66.29 0 bottom
LOGO43  OSHW-LOGOS  [OSHW-LOGO-S]  19.56,81.53 0 bottom
LOGO44  SFE_LOGO_NAME.2_INCH  [SFE_LOGO_NAME_.2]  19.56,71.37 0 bottom
LOGO45  QWIIC_LOGO_5MM  [QWIIC_5MM]  45.47,72.64 0 top
LOGO46  QWIIC_LOGO_5MM  [QWIIC_5MM]  45.47,66.29 0 bottom
LOGO47  OSHW-LOGOS  [OSHW-LOGO-S]  45.47,81.53 0 bottom
LOGO48  SFE_LOGO_NAME.2_INCH  [SFE_LOGO_NAME_.2]  45.47,71.37 0 bottom
LOGO49  QWIIC_LOGO_5MM  [QWIIC_5MM]  71.37,72.64 0 top
LOGO50  QWIIC_LOGO_5MM  [QWIIC_5MM]  71.37,66.29 0 bottom
LOGO51  OSHW-LOGOS  [OSHW-LOGO-S]  71.37,81.53 0 bottom
LOGO52  SFE_LOGO_NAME.2_INCH  [SFE_LOGO_NAME_.2]  71.37,71.37 0 bottom
LOGO53  QWIIC_LOGO_5MM  [QWIIC_5MM]  97.28,72.64 0 top
LOGO54  QWIIC_LOGO_5MM  [QWIIC_5MM]  97.28,66.29 0 bottom
LOGO55  OSHW-LOGOS  [OSHW-LOGO-S]  97.28,81.53 0 bottom
LOGO56  SFE_LOGO_NAME.2_INCH  [SFE_LOGO_NAME_.2]  97.28,71.37 0 bottom
LOGO57  QWIIC_LOGO_5MM  [QWIIC_5MM]  123.19,72.64 0 top
LOGO58  QWIIC_LOGO_5MM  [QWIIC_5MM]  123.19,66.29 0 bottom
LOGO59  OSHW-LOGOS  [OSHW-LOGO-S]  123.19,81.53 0 bottom
LOGO60  SFE_LOGO_NAME.2_INCH  [SFE_LOGO_NAME_.2]  123.19,71.37 0 bottom
LOGO61  QWIIC_LOGO_5MM  [QWIIC_5MM]  19.56,98.55 0 top
LOGO62  QWIIC_LOGO_5MM  [QWIIC_5MM]  19.56,92.2 0 bottom
LOGO63  OSHW-LOGOS  [OSHW-LOGO-S]  19.56,107.44 0 bottom
LOGO64  SFE_LOGO_NAME.2_INCH  [SFE_LOGO_NAME_.2]  19.56,97.28 0 bottom
LOGO65  QWIIC_LOGO_5MM  [QWIIC_5MM]  45.47,98.55 0 top
LOGO66  QWIIC_LOGO_5MM  [QWIIC_5MM]  45.47,92.2 0 bottom
LOGO67  OSHW-LOGOS  [OSHW-LOGO-S]  45.47,107.44 0 bottom
LOGO68  SFE_LOGO_NAME.2_INCH  [SFE_LOGO_NAME_.2]  45.47,97.28 0 bottom
LOGO69  QWIIC_LOGO_5MM  [QWIIC_5MM]  71.37,98.55 0 top
LOGO70  QWIIC_LOGO_5MM  [QWIIC_5MM]  71.37,92.2 0 bottom
LOGO71  OSHW-LOGOS  [OSHW-LOGO-S]  71.37,107.44 0 bottom
LOGO72  SFE_LOGO_NAME.2_INCH  [SFE_LOGO_NAME_.2]  71.37,97.28 0 bottom
LOGO73  QWIIC_LOGO_5MM  [QWIIC_5MM]  97.28,98.55 0 top
LOGO74  QWIIC_LOGO_5MM  [QWIIC_5MM]  97.28,92.2 0 bottom
LOGO75  OSHW-LOGOS  [OSHW-LOGO-S]  97.28,107.44 0 bottom
LOGO76  SFE_LOGO_NAME.2_INCH  [SFE_LOGO_NAME_.2]  97.28,97.28 0 bottom
LOGO77  QWIIC_LOGO_5MM  [QWIIC_5MM]  123.19,98.55 0 top
LOGO78  QWIIC_LOGO_5MM  [QWIIC_5MM]  123.19,92.2 0 bottom
LOGO79  OSHW-LOGOS  [OSHW-LOGO-S]  123.19,107.44 0 bottom
LOGO80  SFE_LOGO_NAME.2_INCH  [SFE_LOGO_NAME_.2]  123.19,97.28 0 bottom
LOGO81  QWIIC_LOGO_5MM  [QWIIC_5MM]  19.56,124.46 0 top
LOGO82  QWIIC_LOGO_5MM  [QWIIC_5MM]  19.56,118.11 0 bottom
LOGO83  OSHW-LOGOS  [OSHW-LOGO-S]  19.56,133.35 0 bottom
LOGO84  SFE_LOGO_NAME.2_INCH  [SFE_LOGO_NAME_.2]  19.56,123.19 0 bottom
LOGO85  QWIIC_LOGO_5MM  [QWIIC_5MM]  45.47,124.46 0 top
LOGO86  QWIIC_LOGO_5MM  [QWIIC_5MM]  45.47,118.11 0 bottom
LOGO87  OSHW-LOGOS  [OSHW-LOGO-S]  45.47,133.35 0 bottom
LOGO88  SFE_LOGO_NAME.2_INCH  [SFE_LOGO_NAME_.2]  45.47,123.19 0 bottom
LOGO89  QWIIC_LOGO_5MM  [QWIIC_5MM]  71.37,124.46 0 top
LOGO90  QWIIC_LOGO_5MM  [QWIIC_5MM]  71.37,118.11 0 bottom
LOGO91  OSHW-LOGOS  [OSHW-LOGO-S]  71.37,133.35 0 bottom
LOGO92  SFE_LOGO_NAME.2_INCH  [SFE_LOGO_NAME_.2]  71.37,123.19 0 bottom
LOGO93  QWIIC_LOGO_5MM  [QWIIC_5MM]  97.28,124.46 0 top
LOGO94  QWIIC_LOGO_5MM  [QWIIC_5MM]  97.28,118.11 0 bottom
LOGO95  OSHW-LOGOS  [OSHW-LOGO-S]  97.28,133.35 0 bottom
LOGO96  SFE_LOGO_NAME.2_INCH  [SFE_LOGO_NAME_.2]  97.28,123.19 0 bottom
LOGO97  QWIIC_LOGO_5MM  [QWIIC_5MM]  123.19,124.46 0 top
LOGO98  QWIIC_LOGO_5MM  [QWIIC_5MM]  123.19,118.11 0 bottom
LOGO99  OSHW-LOGOS  [OSHW-LOGO-S]  123.19,133.35 0 bottom
LOGO100  SFE_LOGO_NAME.2_INCH  [SFE_LOGO_NAME_.2]  123.19,123.19 0 bottom
R1  1k  [0603]  17.53,22.86 0 top
R2  1k  [0603]  43.43,22.86 0 top
R3  1k  [0603]  69.34,22.86 0 top
R4  1k  [0603]  95.25,22.86 0 top
R5  1k  [0603]  121.16,22.86 0 top
R6  1k  [0603]  17.53,48.77 0 top
R7  1k  [0603]  43.43,48.77 0 top
R8  1k  [0603]  69.34,48.77 0 top
R9  1k  [0603]  95.25,48.77 0 top
R10  1k  [0603]  121.16,48.77 0 top
R11  1k  [0603]  17.53,74.68 0 top
R12  1k  [0603]  43.43,74.68 0 top
R13  1k  [0603]  69.34,74.68 0 top
R14  1k  [0603]  95.25,74.68 0 top
R15  1k  [0603]  121.16,74.68 0 top
R16  1k  [0603]  17.53,100.58 0 top
R17  1k  [0603]  43.43,100.58 0 top
R18  1k  [0603]  69.34,100.58 0 top
R19  1k  [0603]  95.25,100.58 0 top
R20  1k  [0603]  121.16,100.58 0 top
R21  1k  [0603]  17.53,126.49 0 top
R22  1k  [0603]  43.43,126.49 0 top
R23  1k  [0603]  69.34,126.49 0 top
R24  1k  [0603]  95.25,126.49 0 top
R25  1k  [0603]  121.16,126.49 0 top
U$1  [PWR0]  15.49,25.4 0 top
U$2  [SFE_LOGO_FLAME_.1]  19.56,15.75 0 top
U$3  [PWR0]  19.81,25.4 0 bottom
U$4  [MULTIPORT0]  15.37,18.29 0 top
U$5  [SFE_LOGO_FLAME_.1]  45.47,15.75 0 top
U$6  [PWR0]  41.4,25.4 0 top
U$7  [MULTI0]  48.01,11.05 0 bottom
U$8  [PORT0]  47.75,9.65 0 bottom
U$9  [PWR0]  15.49,25.4 0 top
U$10  [PWR0]  41.4,25.4 0 top
U$11  [MULTI0]  22.1,11.05 0 bottom
U$12  [PWR0]  45.72,25.4 0 bottom
U$13  [PORT0]  21.84,9.65 0 bottom
U$14  [MULTIPORT0]  41.27,18.29 0 top
U$15  [SFE_LOGO_FLAME_.1]  71.37,15.75 0 top
U$16  [PWR0]  67.31,25.4 0 top
U$17  [MULTI0]  73.91,11.05 0 bottom
U$18  [PORT0]  73.66,9.65 0 bottom
U$19  [PWR0]  67.31,25.4 0 top
U$20  [PWR0]  71.63,25.4 0 bottom
U$21  [MULTIPORT0]  67.18,18.29 0 top
U$22  [SFE_LOGO_FLAME_.1]  97.28,15.75 0 top
U$23  [PWR0]  93.22,25.4 0 top
U$24  [MULTI0]  99.82,11.05 0 bottom
U$25  [PORT0]  99.57,9.65 0 bottom
U$26  [PWR0]  93.22,25.4 0 top
U$27  [PWR0]  97.54,25.4 0 bottom
U$28  [MULTIPORT0]  93.09,18.29 0 top
U$29  [SFE_LOGO_FLAME_.1]  123.19,15.75 0 top
U$30  [PWR0]  119.13,25.4 0 top
U$31  [MULTI0]  125.73,11.05 0 bottom
U$32  [PORT0]  125.48,9.65 0 bottom
U$33  [PWR0]  119.13,25.4 0 top
U$34  [PWR0]  123.44,25.4 0 bottom
U$35  [MULTIPORT0]  119,18.29 0 top
U$36  [SFE_LOGO_FLAME_.1]  19.56,41.66 0 top
U$37  [PWR0]  15.49,51.31 0 top
U$38  [MULTI0]  22.1,36.96 0 bottom
U$39  [PORT0]  21.84,35.56 0 bottom
U$40  [PWR0]  15.49,51.31 0 top
U$41  [PWR0]  19.81,51.31 0 bottom
U$42  [MULTIPORT0]  15.37,44.2 0 top
U$43  [SFE_LOGO_FLAME_.1]  45.47,41.66 0 top
U$44  [PWR0]  41.4,51.31 0 top
U$45  [MULTI0]  48.01,36.96 0 bottom
U$46  [PORT0]  47.75,35.56 0 bottom
U$47  [PWR0]  41.4,51.31 0 top
U$48  [PWR0]  45.72,51.31 0 bottom
U$49  [MULTIPORT0]  41.27,44.2 0 top
U$50  [SFE_LOGO_FLAME_.1]  71.37,41.66 0 top
U$51  [PWR0]  67.31,51.31 0 top
U$52  [MULTI0]  73.91,36.96 0 bottom
U$53  [PORT0]  73.66,35.56 0 bottom
U$54  [PWR0]  67.31,51.31 0 top
U$55  [PWR0]  71.63,51.31 0 bottom
U$56  [MULTIPORT0]  67.18,44.2 0 top
U$57  [SFE_LOGO_FLAME_.1]  97.28,41.66 0 top
U$58  [PWR0]  93.22,51.31 0 top
U$59  [MULTI0]  99.82,36.96 0 bottom
U$60  [PORT0]  99.57,35.56 0 bottom
U$61  [PWR0]  93.22,51.31 0 top
U$62  [PWR0]  97.54,51.31 0 bottom
U$63  [MULTIPORT0]  93.09,44.2 0 top
U$64  [SFE_LOGO_FLAME_.1]  123.19,41.66 0 top
U$65  [PWR0]  119.13,51.31 0 top
U$66  [MULTI0]  125.73,36.96 0 bottom
U$67  [PORT0]  125.48,35.56 0 bottom
U$68  [PWR0]  119.13,51.31 0 top
U$69  [PWR0]  123.44,51.31 0 bottom
U$70  [MULTIPORT0]  119,44.2 0 top
U$71  [SFE_LOGO_FLAME_.1]  19.56,67.56 0 top
U$72  [PWR0]  15.49,77.22 0 top
U$73  [MULTI0]  22.1,62.86 0 bottom
U$74  [PORT0]  21.84,61.47 0 bottom
U$75  [PWR0]  15.49,77.22 0 top
U$76  [PWR0]  19.81,77.22 0 bottom
U$77  [MULTIPORT0]  15.37,70.1 0 top
U$78  [SFE_LOGO_FLAME_.1]  45.47,67.56 0 top
U$79  [PWR0]  41.4,77.22 0 top
U$80  [MULTI0]  48.01,62.86 0 bottom
U$81  [PORT0]  47.75,61.47 0 bottom
U$82  [PWR0]  41.4,77.22 0 top
U$83  [PWR0]  45.72,77.22 0 bottom
U$84  [MULTIPORT0]  41.27,70.1 0 top
U$85  [SFE_LOGO_FLAME_.1]  71.37,67.56 0 top
U$86  [PWR0]  67.31,77.22 0 top
U$87  [MULTI0]  73.91,62.86 0 bottom
U$88  [PORT0]  73.66,61.47 0 bottom
U$89  [PWR0]  67.31,77.22 0 top
U$90  [PWR0]  71.63,77.22 0 bottom
U$91  [MULTIPORT0]  67.18,70.1 0 top
U$92  [SFE_LOGO_FLAME_.1]  97.28,67.56 0 top
U$93  [PWR0]  93.22,77.22 0 top
U$94  [MULTI0]  99.82,62.86 0 bottom
U$95  [PORT0]  99.57,61.47 0 bottom
U$96  [PWR0]  93.22,77.22 0 top
U$97  [PWR0]  97.54,77.22 0 bottom
U$98  [MULTIPORT0]  93.09,70.1 0 top
U$99  [SFE_LOGO_FLAME_.1]  123.19,67.56 0 top
U$100  [PWR0]  119.13,77.22 0 top
U$101  [MULTI0]  125.73,62.86 0 bottom
U$102  [PORT0]  125.48,61.47 0 bottom
U$103  [PWR0]  119.13,77.22 0 top
U$104  [PWR0]  123.44,77.22 0 bottom
U$105  [MULTIPORT0]  119,70.1 0 top
U$106  [SFE_LOGO_FLAME_.1]  19.56,93.47 0 top
U$107  [PWR0]  15.49,103.12 0 top
U$108  [MULTI0]  22.1,88.77 0 bottom
U$109  [PORT0]  21.84,87.38 0 bottom
U$110  [PWR0]  15.49,103.12 0 top
U$111  [PWR0]  19.81,103.12 0 bottom
U$112  [MULTIPORT0]  15.37,96.01 0 top
U$113  [SFE_LOGO_FLAME_.1]  45.47,93.47 0 top
U$114  [PWR0]  41.4,103.12 0 top
U$115  [MULTI0]  48.01,88.77 0 bottom
U$116  [PORT0]  47.75,87.38 0 bottom
U$117  [PWR0]  41.4,103.12 0 top
U$118  [PWR0]  45.72,103.12 0 bottom
U$119  [MULTIPORT0]  41.27,96.01 0 top
U$120  [SFE_LOGO_FLAME_.1]  71.37,93.47 0 top
U$121  [PWR0]  67.31,103.12 0 top
U$122  [MULTI0]  73.91,88.77 0 bottom
U$123  [PORT0]  73.66,87.38 0 bottom
U$124  [PWR0]  67.31,103.12 0 top
U$125  [PWR0]  71.63,103.12 0 bottom
U$126  [MULTIPORT0]  67.18,96.01 0 top
U$127  [SFE_LOGO_FLAME_.1]  97.28,93.47 0 top
U$128  [PWR0]  93.22,103.12 0 top
U$129  [MULTI0]  99.82,88.77 0 bottom
U$130  [PORT0]  99.57,87.38 0 bottom
U$131  [PWR0]  93.22,103.12 0 top
U$132  [PWR0]  97.54,103.12 0 bottom
U$133  [MULTIPORT0]  93.09,96.01 0 top
U$134  [SFE_LOGO_FLAME_.1]  123.19,93.47 0 top
U$135  [PWR0]  119.13,103.12 0 top
U$136  [MULTI0]  125.73,88.77 0 bottom
U$137  [PORT0]  125.48,87.38 0 bottom
U$138  [PWR0]  119.13,103.12 0 top
U$139  [PWR0]  123.44,103.12 0 bottom
U$140  [MULTIPORT0]  119,96.01 0 top
U$141  [SFE_LOGO_FLAME_.1]  19.56,119.38 0 top
U$142  [PWR0]  15.49,129.03 0 top
U$143  [MULTI0]  22.1,114.68 0 bottom
U$144  [PORT0]  21.84,113.28 0 bottom
U$145  [PWR0]  15.49,129.03 0 top
U$146  [PWR0]  19.81,129.03 0 bottom
U$147  [MULTIPORT0]  15.37,121.92 0 top
U$148  [SFE_LOGO_FLAME_.1]  45.47,119.38 0 top
U$149  [PWR0]  41.4,129.03 0 top
U$150  [MULTI0]  48.01,114.68 0 bottom
U$151  [PORT0]  47.75,113.28 0 bottom
U$152  [PWR0]  41.4,129.03 0 top
U$153  [PWR0]  45.72,129.03 0 bottom
U$154  [MULTIPORT0]  41.27,121.92 0 top
U$155  [SFE_LOGO_FLAME_.1]  71.37,119.38 0 top
U$156  [PWR0]  67.31,129.03 0 top
U$157  [MULTI0]  73.91,114.68 0 bottom
U$158  [PORT0]  73.66,113.28 0 bottom
U$159  [PWR0]  67.31,129.03 0 top
U$160  [PWR0]  71.63,129.03 0 bottom
U$161  [MULTIPORT0]  67.18,121.92 0 top
U$162  [SFE_LOGO_FLAME_.1]  97.28,119.38 0 top
U$163  [PWR0]  93.22,129.03 0 top
U$164  [MULTI0]  99.82,114.68 0 bottom
U$165  [PORT0]  99.57,113.28 0 bottom
U$166  [PWR0]  93.22,129.03 0 top
U$167  [PWR0]  97.54,129.03 0 bottom
U$168  [MULTIPORT0]  93.09,121.92 0 top
U$169  [SFE_LOGO_FLAME_.1]  123.19,119.38 0 top
U$170  [PWR0]  119.13,129.03 0 top
U$171  [MULTI0]  125.73,114.68 0 bottom
U$172  [PORT0]  125.48,113.28 0 bottom
U$173  [PWR0]  119.13,129.03 0 top
U$174  [PWR0]  123.44,129.03 0 bottom
U$175  [MULTIPORT0]  119,121.92 0 top

## Library data of the parts
D1-D25 = SparkFun-LED; PROD_ID: DIO-00819
E$1-E$4 FD1-FD100 LOGO1-LOGO100 U$2 U$5 U$15 U$22 U$29 U$36 U$43 U$50 U$57 U$64 U$71 U$78 U$85 U$92 U$99 U$106 U$113 U$120 U$127 U$134 U$141 U$148 U$155 U$162 U$169 = SparkFun-Aesthetics
E$5 E$6 = SparkFun-Retired
H1-H50 = SparkFun-Hardware
J1-J100 = SparkFun-Connectors; PROD_ID: CONN-13694
JP1-JP25 = SparkFun-Jumpers
R1-R25 = SparkFun-Resistors; PROD_ID: RES-07856
U$1 U$3 U$4 U$6-U$14 U$16-U$21 U$23-U$28 U$30-U$35 U$37-U$42 U$44-U$49 U$51-U$56 U$58-U$63 U$65-U$70 U$72-U$77 U$79-U$84 U$86-U$91 U$93-U$98 U$100-U$105 U$107-U$112 U$114-U$119 U$121-U$126 U$128-U$133 U$135-U$140 U$142-U$147 U$149-U$154 U$156-U$161 U$163-U$168 U$170-U$175 = output

## Nets
3.3V: J1.2 J2.2 J3.2 J4.2 JP1.2
3.3V1: J5.2 J6.2 J7.2 J8.2 JP2.2
3.3V2: J9.2 J10.2 J11.2 J12.2 JP3.2
3.3V3: J13.2 J14.2 J15.2 J16.2 JP4.2
3.3V4: J17.2 J18.2 J19.2 J20.2 JP5.2
3.3V5: J21.2 J22.2 J23.2 J24.2 JP6.2
3.3V6: J25.2 J26.2 J27.2 J28.2 JP7.2
3.3V7: J29.2 J30.2 J31.2 J32.2 JP8.2
3.3V8: J33.2 J34.2 J35.2 J36.2 JP9.2
3.3V9: J37.2 J38.2 J39.2 J40.2 JP10.2
3.3V10: J41.2 J42.2 J43.2 J44.2 JP11.2
3.3V11: J45.2 J46.2 J47.2 J48.2 JP12.2
3.3V12: J49.2 J50.2 J51.2 J52.2 JP13.2
3.3V13: J53.2 J54.2 J55.2 J56.2 JP14.2
3.3V14: J57.2 J58.2 J59.2 J60.2 JP15.2
3.3V15: J61.2 J62.2 J63.2 J64.2 JP16.2
3.3V16: J65.2 J66.2 J67.2 J68.2 JP17.2
3.3V17: J69.2 J70.2 J71.2 J72.2 JP18.2
3.3V18: J73.2 J74.2 J75.2 J76.2 JP19.2
3.3V19: J77.2 J78.2 J79.2 J80.2 JP20.2
3.3V20: J81.2 J82.2 J83.2 J84.2 JP21.2
3.3V21: J85.2 J86.2 J87.2 J88.2 JP22.2
3.3V22: J89.2 J90.2 J91.2 J92.2 JP23.2
3.3V23: J93.2 J94.2 J95.2 J96.2 JP24.2
3.3V24: J97.2 J98.2 J99.2 J100.2 JP25.2
GND: D1.C J1.1 J2.1 J3.1 J4.1
GND1: D2.C J5.1 J6.1 J7.1 J8.1
GND2: D3.C J9.1 J10.1 J11.1 J12.1
GND3: D4.C J13.1 J14.1 J15.1 J16.1
GND4: D5.C J17.1 J18.1 J19.1 J20.1
GND5: D6.C J21.1 J22.1 J23.1 J24.1
GND6: D7.C J25.1 J26.1 J27.1 J28.1
GND7: D8.C J29.1 J30.1 J31.1 J32.1
GND8: D9.C J33.1 J34.1 J35.1 J36.1
GND9: D10.C J37.1 J38.1 J39.1 J40.1
GND10: D11.C J41.1 J42.1 J43.1 J44.1
GND11: D12.C J45.1 J46.1 J47.1 J48.1
GND12: D13.C J49.1 J50.1 J51.1 J52.1
GND13: D14.C J53.1 J54.1 J55.1 J56.1
GND14: D15.C J57.1 J58.1 J59.1 J60.1
GND15: D16.C J61.1 J62.1 J63.1 J64.1
GND16: D17.C J65.1 J66.1 J67.1 J68.1
GND17: D18.C J69.1 J70.1 J71.1 J72.1
GND18: D19.C J73.1 J74.1 J75.1 J76.1
GND19: D20.C J77.1 J78.1 J79.1 J80.1
GND20: D21.C J81.1 J82.1 J83.1 J84.1
GND21: D22.C J85.1 J86.1 J87.1 J88.1
GND22: D23.C J89.1 J90.1 J91.1 J92.1
GND23: D24.C J93.1 J94.1 J95.1 J96.1
GND24: D25.C J97.1 J98.1 J99.1 J100.1
N$1: D1.A R1.1
N$2: JP1.1 R1.2
N$3: D2.A R2.1
N$4: JP2.1 R2.2
N$5: D3.A R3.1
N$6: JP3.1 R3.2
N$7: D4.A R4.1
N$8: JP4.1 R4.2
N$9: D5.A R5.1
N$10: JP5.1 R5.2
N$11: D6.A R6.1
N$12: JP6.1 R6.2
N$13: D7.A R7.1
N$14: JP7.1 R7.2
N$15: D8.A R8.1
N$16: JP8.1 R8.2
N$17: D9.A R9.1
N$18: JP9.1 R9.2
N$19: D10.A R10.1
N$20: JP10.1 R10.2
N$21: D11.A R11.1
N$22: JP11.1 R11.2
N$23: D12.A R12.1
N$24: JP12.1 R12.2
N$25: D13.A R13.1
N$26: JP13.1 R13.2
N$27: D14.A R14.1
N$28: JP14.1 R14.2
N$29: D15.A R15.1
N$30: JP15.1 R15.2
N$31: D16.A R16.1
N$32: JP16.1 R16.2
N$33: D17.A R17.1
N$34: JP17.1 R17.2
N$35: D18.A R18.1
N$36: JP18.1 R18.2
N$37: D19.A R19.1
N$38: JP19.1 R19.2
N$39: D20.A R20.1
N$40: JP20.1 R20.2
N$41: D21.A R21.1
N$42: JP21.1 R21.2
N$43: D22.A R22.1
N$44: JP22.1 R22.2
N$45: D23.A R23.1
N$46: JP23.1 R23.2
N$47: D24.A R24.1
N$48: JP24.1 R24.2
N$49: D25.A R25.1
N$50: JP25.1 R25.2
SCL: J1.4 J2.4 J3.4 J4.4
SCL1: J5.4 J6.4 J7.4 J8.4
SCL2: J9.4 J10.4 J11.4 J12.4
SCL3: J13.4 J14.4 J15.4 J16.4
SCL4: J17.4 J18.4 J19.4 J20.4
SCL5: J21.4 J22.4 J23.4 J24.4
SCL6: J25.4 J26.4 J27.4 J28.4
SCL7: J29.4 J30.4 J31.4 J32.4
SCL8: J33.4 J34.4 J35.4 J36.4
SCL9: J37.4 J38.4 J39.4 J40.4
SCL10: J41.4 J42.4 J43.4 J44.4
SCL11: J45.4 J46.4 J47.4 J48.4
SCL12: J49.4 J50.4 J51.4 J52.4
SCL13: J53.4 J54.4 J55.4 J56.4
SCL14: J57.4 J58.4 J59.4 J60.4
SCL15: J61.4 J62.4 J63.4 J64.4
SCL16: J65.4 J66.4 J67.4 J68.4
SCL17: J69.4 J70.4 J71.4 J72.4
SCL18: J73.4 J74.4 J75.4 J76.4
SCL19: J77.4 J78.4 J79.4 J80.4
SCL20: J81.4 J82.4 J83.4 J84.4
SCL21: J85.4 J86.4 J87.4 J88.4
SCL22: J89.4 J90.4 J91.4 J92.4
SCL23: J93.4 J94.4 J95.4 J96.4
SCL24: J97.4 J98.4 J99.4 J100.4
SDA: J1.3 J2.3 J3.3 J4.3
SDA1: J5.3 J6.3 J7.3 J8.3
SDA2: J9.3 J10.3 J11.3 J12.3
SDA3: J13.3 J14.3 J15.3 J16.3
SDA4: J17.3 J18.3 J19.3 J20.3
SDA5: J21.3 J22.3 J23.3 J24.3
SDA6: J25.3 J26.3 J27.3 J28.3
SDA7: J29.3 J30.3 J31.3 J32.3
SDA8: J33.3 J34.3 J35.3 J36.3
SDA9: J37.3 J38.3 J39.3 J40.3
SDA10: J41.3 J42.3 J43.3 J44.3
SDA11: J45.3 J46.3 J47.3 J48.3
SDA12: J49.3 J50.3 J51.3 J52.3
SDA13: J53.3 J54.3 J55.3 J56.3
SDA14: J57.3 J58.3 J59.3 J60.3
SDA15: J61.3 J62.3 J63.3 J64.3
SDA16: J65.3 J66.3 J67.3 J68.3
SDA17: J69.3 J70.3 J71.3 J72.3
SDA18: J73.3 J74.3 J75.3 J76.3
SDA19: J77.3 J78.3 J79.3 J80.3
SDA20: J81.3 J82.3 J83.3 J84.3
SDA21: J85.3 J86.3 J87.3 J88.3
SDA22: J89.3 J90.3 J91.3 J92.3
SDA23: J93.3 J94.3 J95.3 J96.3
SDA24: J97.3 J98.3 J99.3 J100.3